# EAGLE board MODEL - Circuit (EAGLE 7.6.0)

Size 73.58 x 164.99 mm. Coordinates in mm from the lower left corner, seen from the top.
Outline: 0,0 56.82,0 56.82,53.33 0,53.33 0,0
Copper layers (1*16): Top 0.035mm / dielectric 1.5mm / Bottom 0.035mm
Design rules "default": minimum track width 10mil, minimum drill 24mil, track to track 8mil, track to pad 8mil, pad to pad 8mil, via to via 8mil, smd to smd 8mil, copper to edge 40mil, drill to drill 8mil, minimum pad ring 10mil, minimum via ring 8mil, stop-mask expansion 4mil, vias tented up to drill 0mil, thermal gap 10mil

## Footprints (pad centres in the part's own frame; a part is rotated, then mirrored left to right if it is on the bottom)
LED5MM = drill 0.813 octagon: A -1.27,0; K 1.27,0
DC-POWER = drill 0.889 pad 2.54 octagon: + 0,2.54; - 0,-2.54
0207/10 = drill 0.813 octagon: 1 -5.08,0; 2 5.08,0
TL1105 = drill 1 pad 1.676: 1 -2.25,3.25; 2 2.25,3.25; 3 -2.25,-3.25; 4 2.25,-3.25
ARDUINO_UNO = drill 1.016 pad 1.88: 0 63.5,50.8; 1 60.96,50.8; 2 58.42,50.8; 3 55.88,50.8; 3.3V 35.56,2.54; 4 53.34,50.8; 5 50.8,50.8; 5V 38.1,2.54; 6 48.26,50.8; 7 45.72,50.8; 8 41.656,50.8; 9 39.116,50.8; 10 36.576,50.8; 11 34.036,50.8; 12 31.496,50.8; 13 28.956,50.8; A0 50.8,2.54; A1 53.34,2.54; A2 55.88,2.54; A3 58.42,2.54; A4 60.96,2.54; A5 63.5,2.54; AREF 23.876,50.8; GND 26.416,50.8; GND. 43.18,2.54; GND.. 40.64,2.54; I/OREF 30.48,2.54; N/C 27.94,2.54; RESET 33.02,2.54; SCL 18.796,50.8; SDA 21.336,50.8; VIN 45.72,2.54 | hole 3.2: 66.04,7.62; 66.04,35.56; 15.24,50.8; 13.97,2.54

## Placement (x,y rotation side)
D1  [LED5MM]  5,124.38 0 top
D2  [LED5MM]  5,149.78 0 top
D3  [LED5MM]  5,162.48 0 top
D4  [LED5MM]  5,175.18 0 top  (outside the outline)
D5  [LED5MM]  5,187.88 0 top  (outside the outline)
D6  [LED5MM]  5,200.58 0 top  (outside the outline)
D7  [LED5MM]  5,213.28 0 top  (outside the outline)
D8  [LED5MM]  5,225.98 0 top  (outside the outline)
D9  [LED5MM]  5,238.68 0 top  (outside the outline)
D10  [LED5MM]  5,251.38 0 top  (outside the outline)
D11  [LED5MM]  5,264.08 0 top  (outside the outline)
D12  [LED5MM]  5,276.78 0 top  (outside the outline)
D13  [LED5MM]  5,289.48 0 top  (outside the outline)
D14  [LED5MM]  5,302.18 0 top  (outside the outline)
D15  [LED5MM]  5,314.88 0 top  (outside the outline)
Meter1  [DC-POWER]  5,505.38 0 top  (outside the outline)
R1  10k‎Ω  [0207/10]  5,60.88 0 top
R2  10k‎Ω  [0207/10]  5,73.58 0 top
R3  10k‎Ω  [0207/10]  5,86.28 0 top
R4  10k‎Ω  [0207/10]  5,98.98 0 top
R5  220‎Ω  [0207/10]  5,137.08 0 top
R6  220‎Ω  [0207/10]  5,327.58 0 top  (outside the outline)
R7  220‎Ω  [0207/10]  5,340.28 0 top  (outside the outline)
R8  220‎Ω  [0207/10]  5,352.98 0 top  (outside the outline)
R9  220‎Ω  [0207/10]  5,365.68 0 top  (outside the outline)
R10  220‎Ω  [0207/10]  5,378.38 0 top  (outside the outline)
R11  220‎Ω  [0207/10]  5,391.08 0 top  (outside the outline)
R12  220‎Ω  [0207/10]  5,403.78 0 top  (outside the outline)
R13  220‎Ω  [0207/10]  5,416.48 0 top  (outside the outline)
R14  220‎Ω  [0207/10]  5,429.18 0 top  (outside the outline)
R15  220‎Ω  [0207/10]  5,441.88 0 top  (outside the outline)
R16  100‎Ω  [0207/10]  5,454.58 0 top  (outside the outline)
R17  220‎Ω  [0207/10]  5,467.28 0 top  (outside the outline)
R18  220‎Ω  [0207/10]  5,479.98 0 top  (outside the outline)
R19  220‎Ω  [0207/10]  5,492.68 0 top  (outside the outline)
S1  [TL1105]  5,10.08 0 top
S2  [TL1105]  5,22.78 0 top
S3  [TL1105]  5,35.48 0 top
S4  [TL1105]  5,48.18 0 top
U1  [ARDUINO_UNO]  5,111.68 0 top

## Library data of the parts
D1-D15 Meter1 R1-R19 S1-S4 U1 = AUTODESK_CIRCUITS_BREADBOARD

## Nets
N$1: R4.2 S4.4
N$2: R3.2 S3.4
N$3: R1.2 S2.4
N$4: R2.2 S1.4
N$5: S1.3 S2.3 S3.3 S4.3 U1.5V
N$6: S4.2 U1.A0
N$7: S3.2 U1.A1
N$8: S2.2 U1.A2
N$9: S1.2 U1.A3
N$10: D1.K R5.2
N$11: D6.K R10.2
N$12: D7.K R11.2
N$13: D8.K R12.2
N$14: D9.K R13.2
N$15: D10.K R14.2
N$16: D11.K R15.2
N$17: R1.1 R2.1 R3.1 R4.1 R5.1 R6.1 R7.1 R8.1 R9.1 R10.1 R11.1 R12.1 R13.1 R14.1 R15.1 R16.1 R17.1 R18.1 R19.1 U1.GND
N$18: D12.K Meter1.- R16.2
N$19: D13.K R17.2
N$20: D14.K R18.2
N$21: D15.K R19.2
N$22: D12.A Meter1.+ U1.A4
N$23: D13.A U1.A5
N$24: D14.A U1.2
N$25: D15.A U1.3
N$26: D6.A U1.4
N$27: D7.A U1.5
N$28: D8.A U1.6
N$29: D9.A U1.7
N$30: D10.A U1.8
N$31: D11.A U1.9
N$32: D2.K R6.2
N$33: D3.K R7.2
N$34: D4.K R8.2
N$35: D5.K R9.2
N$36: D1.A U1.10
N$37: D2.A U1.11
N$38: D3.A U1.12
N$39: D4.A U1.13

## Tracks (layer width: path | path; a pad name or v marks a point on that pad's centre or on a via)
N$1  (1 unrouted)
N$2  (1 unrouted)
N$3  (1 unrouted)
N$4  (1 unrouted)
N$5  (4 unrouted)
N$6  (1 unrouted)
N$7  (1 unrouted)
N$8  (1 unrouted)
N$9  (1 unrouted)
N$10  (1 unrouted)
N$11  (1 unrouted)
N$12  (1 unrouted)
N$13  (1 unrouted)
N$14  (1 unrouted)
N$15  (1 unrouted)
N$16  (1 unrouted)
N$17  (19 unrouted)
N$18  (2 unrouted)
N$19  (1 unrouted)
N$20  (1 unrouted)
N$21  (1 unrouted)
N$22  (2 unrouted)
N$23  (1 unrouted)
N$24  (1 unrouted)
N$25  (1 unrouted)
N$26  (1 unrouted)
N$27  (1 unrouted)
N$28  (1 unrouted)
N$29  (1 unrouted)
N$30  (1 unrouted)
N$31  (1 unrouted)
N$32  (1 unrouted)
N$33  (1 unrouted)
N$34  (1 unrouted)
N$35  (1 unrouted)
N$36  (1 unrouted)
N$37  (1 unrouted)
N$38  (1 unrouted)
N$39  (1 unrouted)